# Altium PCB EncoderArm.PcbDoc
Units mil, origin at the board's own origin, x right, y up, seen from the top; angles counter-clockwise.
Board outline 2045.46 x 2608.46 mil, 2 copper layers (Top Layer, Bottom Layer); 6 components, 6 nets, 24 pads, 4 vias.
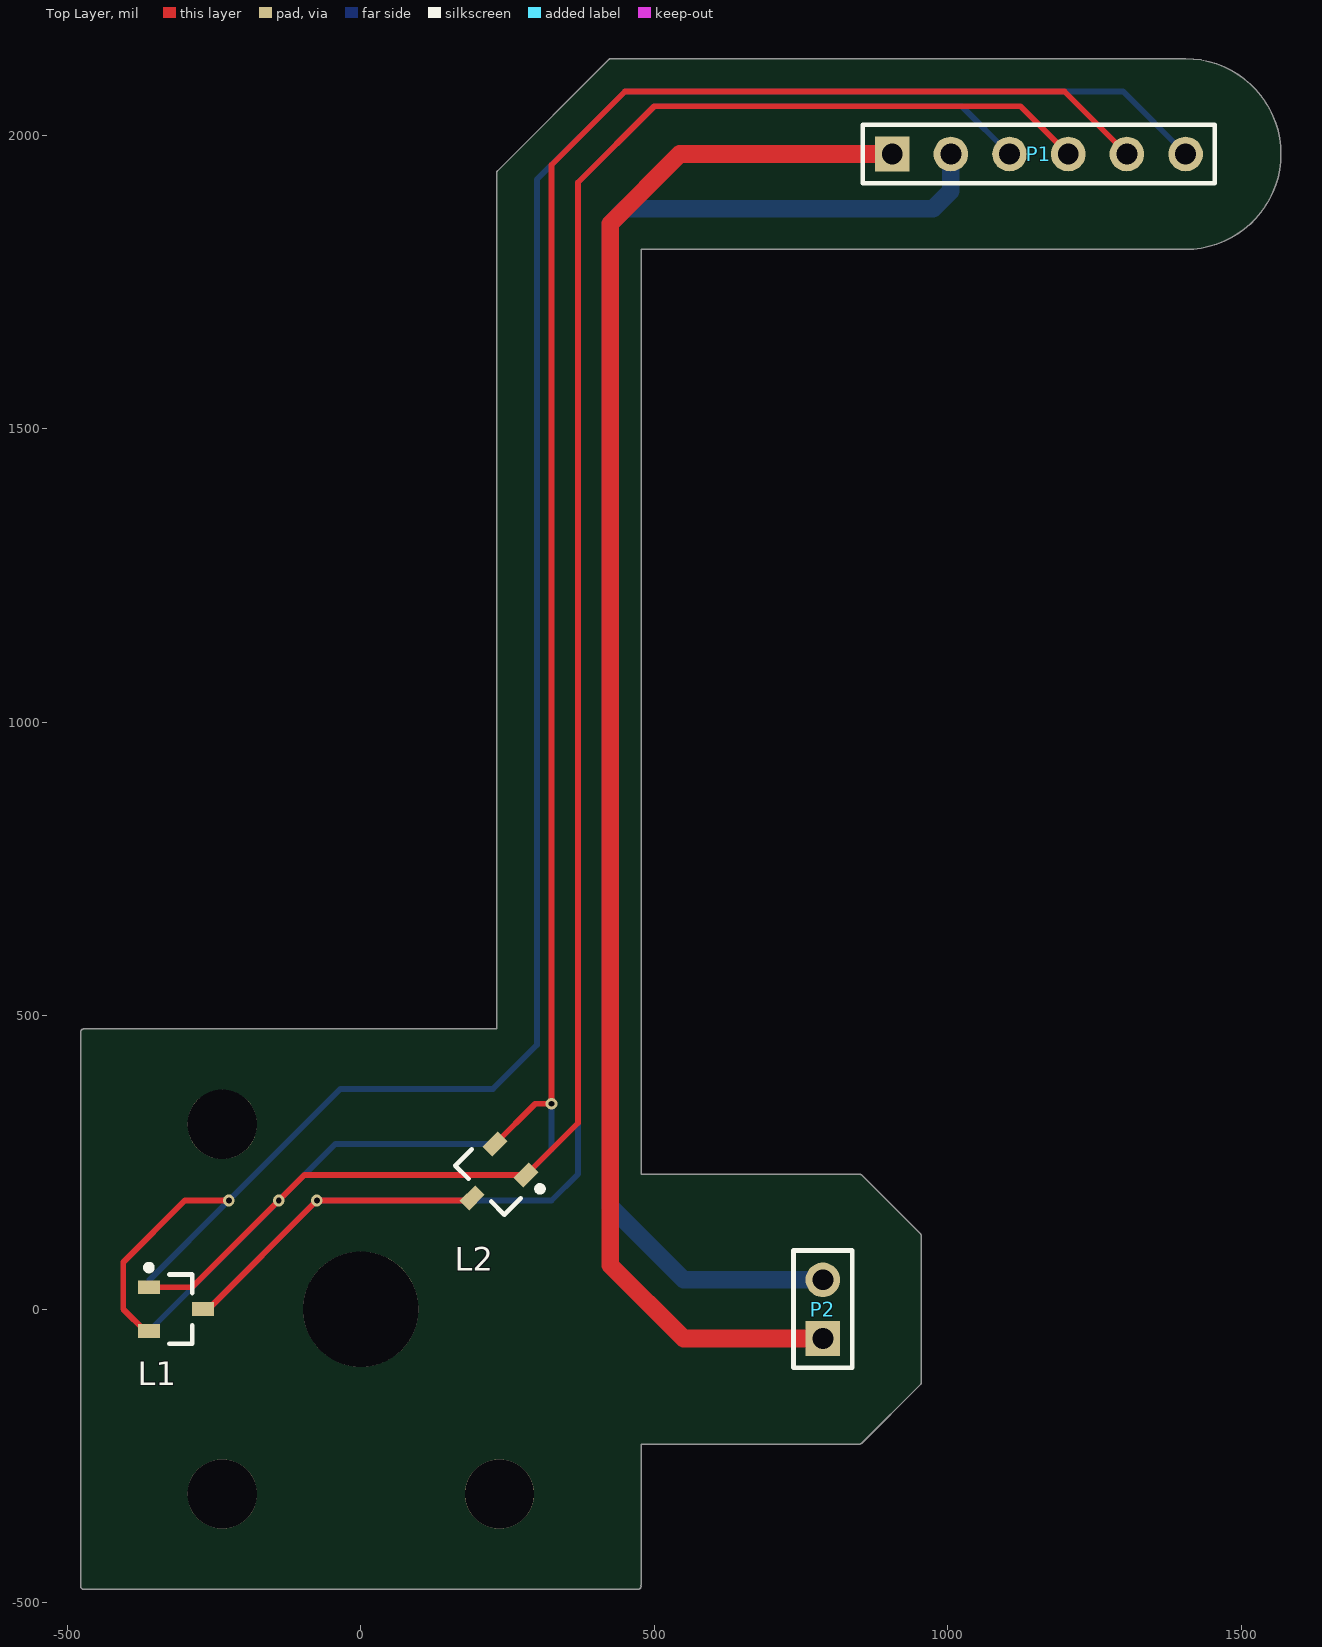
[diagram p0: Top Layer view]
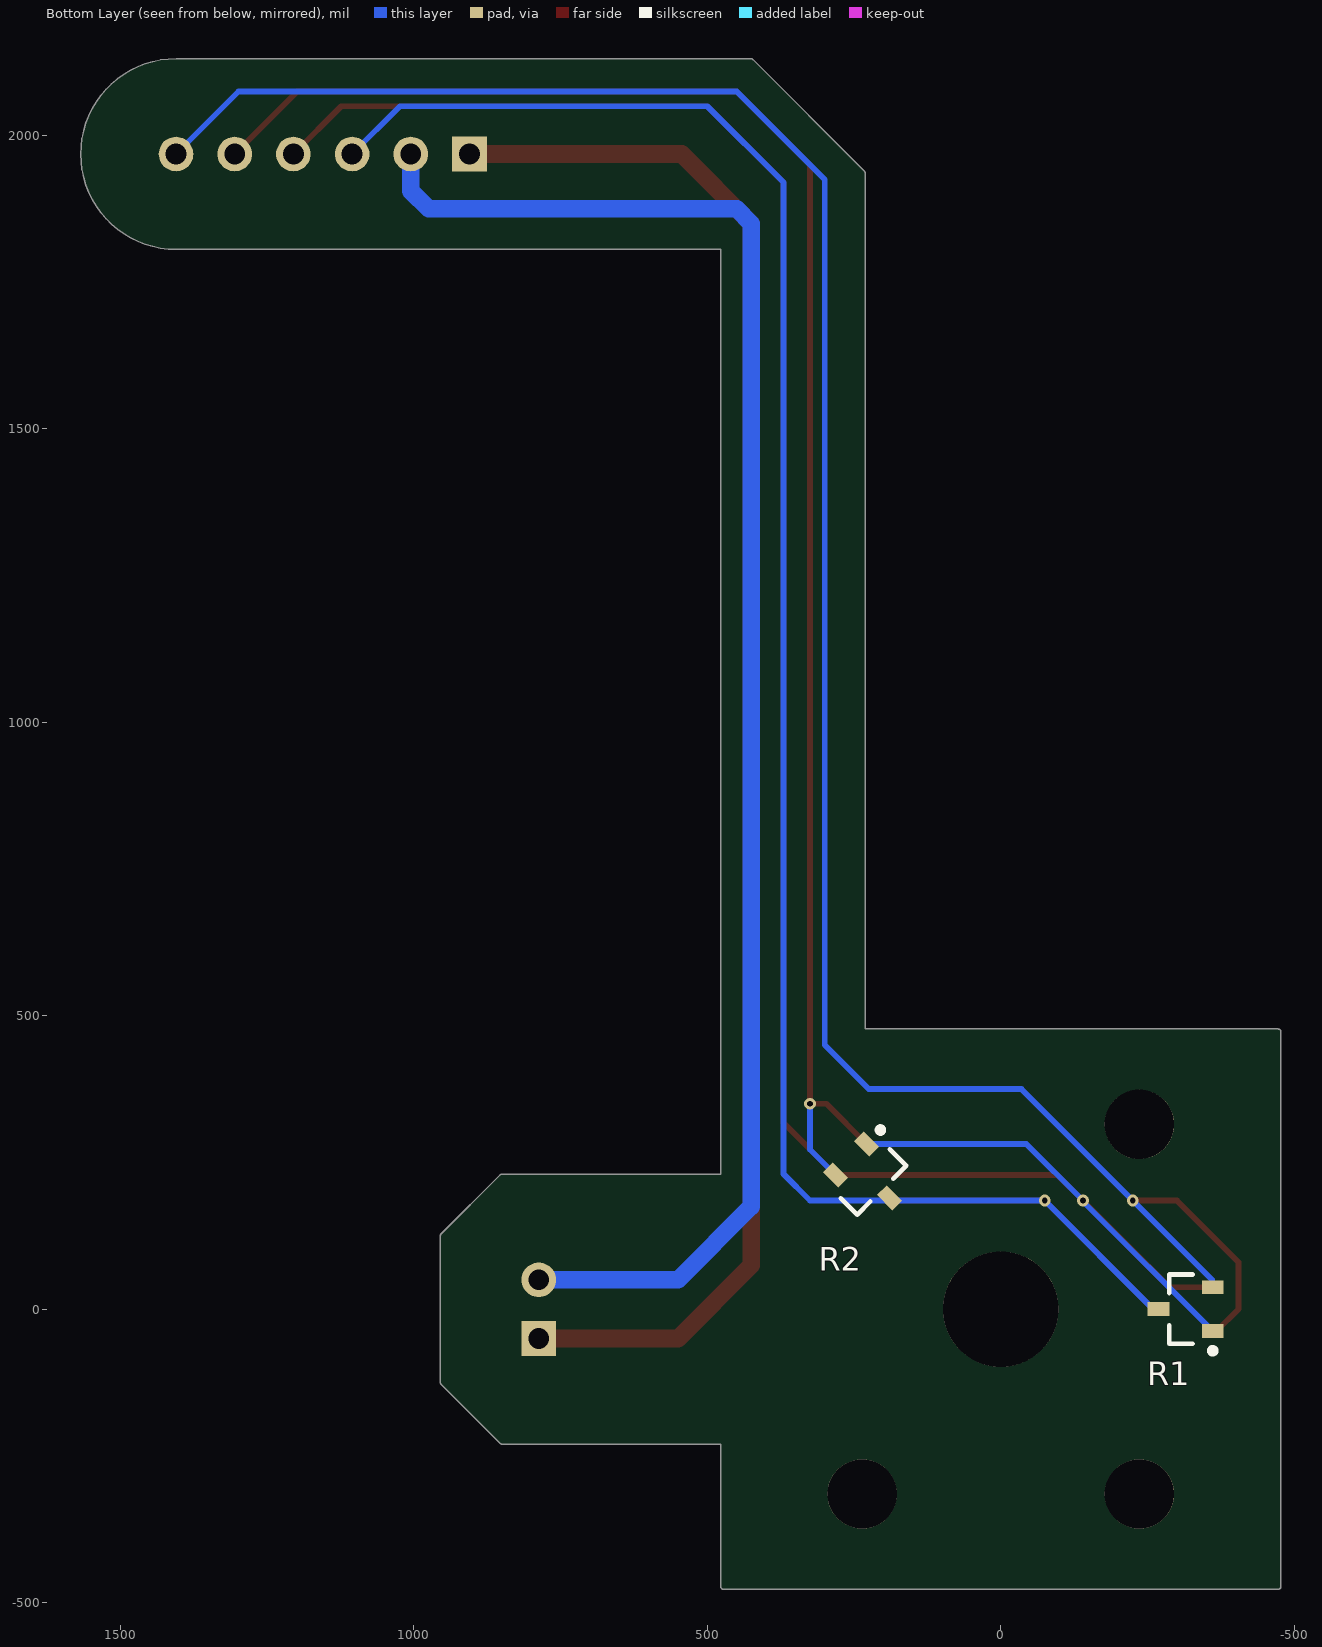
[diagram p1: Bottom Layer view, seen from below]

## Layer stack, top to bottom
Top Solder: solder mask 0.4, Solder Resist, Dk 3.5
Top Layer: signal copper 1.4
Dielectric 1: dielectric 12.6, FR-4, Dk 4.8
Bottom Layer: signal copper 1.4
Bottom Solder: solder mask 0.4, Solder Resist, Dk 3.5

## Board outline
-472.44,-477.46 472.44,-477.46 ccw(c472.44,-472.44) 477.46,-472.44 ccw(c472.44,-472.44) 477.29,-471.16 ccw(c472.44,-469.88) 477.46,-469.88 477.46,-230.02 850,-230.02 ccw(c850,-225) 853.56,-228.53 853.55,-228.55 953.55,-128.55 953.53,-128.56 ccw(c950,-125) 955.02,-125 955.02,125 ccw(c950,125) 953.53,128.56 953.55,128.55 853.55,228.55 853.56,228.53 ccw(c850,225) 850,230.01 477.46,230.01 477.46,1806.01 1405.51,1806.01 ccw(c1405.51,1968.5) 1568.01,1968.5 ccw(c1405.51,1968.5) 1405.51,2131 ccw(c1405.51,2125.99) 1405.42,2131 425.98,2131 ccw(c425.98,2125.98) 422.42,2129.51 422.44,2129.53 232.67,1939.77 232.69,1939.78 ccw(c236.22,1936.22) 231.21,1936.22 231.21,477.46 -472.44,477.46 ccw(c-472.44,472.44) -477.46,472.44 -477.46,-472.44 ccw(c-472.44,-472.44)

## Design rules (kind name [scope] priority, off if disabled: settings)
Clearance [All] p1: gap=10
PolygonConnect [All] p1: connectstyle=Relief reliefconductorwidth=10 reliefentries=4 polygonreliefangle="90 Angle" airgapwidth=10
RoutingVias [All] p1: holewidth=28 width=50 viastyle="Through Hole" minholewidth=28 minwidth=50 maxholewidth=28 maxwidth=50
SolderMaskExpansion [All] p1: expansion=4
Width [All] p1: maxlimit=30 minlimit=10 preferedwidth=10
30 further rules are at their usual default settings.

## Components (designator, comment, footprint, x,y, rotation, side; value= is the part's Value field where it differs from the comment)
L1 "A1120 Hall Effect" SOT23-3N -314.96,0 r0 top
L2 "A1120 Hall Effect" SOT23-3N 222.44,222.44 r225 top
P1 "Connection to Controller" HDR1X6 905.51,1968.5 r0 top
P2 "Motor" HDR1X2 787.4,-50 r90 top
R1 "A1120 Hall Effect" SOT23-3N -314.96,0 r0 bottom
R2 "A1120 Hall Effect" SOT23-3N 222.44,222.44 r225 bottom

## Footprints (in the part's own frame and the unit in brackets; to place one, negate y for a bottom-side part, rotate by r counter-clockwise, add the part's x,y. Pads: shape width x height; smd on the part's side, far side on the other; paste and mask are expansions set on the pad)
HDR1X2 [mm] "Connector; Header; 2 Position"
  rect 1.5x1.5 hole 0.9: 1(0,0)
  round 1.5 hole 0.9: 2(2.54,0)
  silkscreen extent -1.27,-1.27 3.81,1.27
HDR1X6 [mm] "Connector; Header; 6 Position"
  rect 1.5x1.5 hole 0.9: 1(0,0)
  round 1.5 hole 0.9: 2(2.54,0) 3(5.08,0) 4(7.62,0) 5(10.16,0) 6(12.7,0)
  silkscreen extent -1.27,-1.27 13.97,1.27
SOT23-3N [mm] "SOT23, 3-Leads, Body 2.90x2.35mm, Pitch 0.95mm, IPC Medium Density"
  rect 0.95x0.6 smd: 1(-1.175,0.95) 2(-1.175,-0.95) 3(1.175,0)
  silkscreen extent -1.3,-1.5 0.7,1.92, body extent -0.7,-1.5 0.7,1.5, height 1.1

## Part data
L1 L2 R1 R2: library part FT_SOT23-3
P1: library part "Header 6", "Header, 6-Pin"
P2: library part "Header 2", "Header, 2-Pin"

## Free pads (board coordinates)
  round 118.11 hole 118.11: 0(-236.22,-314.96) 0(-236.22,314.96) 0(236.22,-314.96)
  round 196.85 hole 196.85: 0(0,0)

## Via types
v1: diameter 20, hole 10, Top Layer to Bottom Layer, 4 vias

## Nets (pads, with @x,y where several pads share a name; then routed paths per layer and width w, separated by ;. In a path a pad name is that pad's centre, name@x,y a point inside that pad or via, vN(x,y) a via of type N, cw(c..) or ccw(c..) an arc to the next point about the centre after c; other vN are vias at no path point)
GND: L1.3 L2.3 P1.3 R1.3 R2.3 | length 3784.1
  Top Layer w10: L1.3 -260,0 v1(-75,185) 185,185 L2.3
  Bottom Layer w10: R1.3 -260,0 v1(-75,185) 325,185 370,230 370,1920 500,2050 1024.02,2050 P1.3
M1A: P1.1 P2.1 | length 2718.8
  Top Layer w30: P2.1 550,-50 425,75 425,1850 543.5,1968.5 P1.1
M1B: P1.2 P2.2 | length 2755.7
  Bottom Layer w30: P2.2 550,50 425,175 425,1850 450,1875 975,1875 1005.51,1905.51 P1.2
VCC: L1.1 L2.1 P1.4 R1.1 R2.1 | length 4095.5
  Top Layer w10: L1.1 -287.6,37.4 v1(-140,185) -96.3,228.7 L2.1 370,317.11 370,1920 500,2050 1124.02,2050 P1.4
  Bottom Layer w10: R1.1 v1@-139.41,184.41 ; v1(-140,185) -43.4,281.6 R2.1
VOUT1: L1.2 P1.6 R1.2 | length 3888.3
  Top Layer w10: L1.2 -367.6,-37.4 -405,0 -405,80 -300,185 v1(-225,185)
  Bottom Layer w10: R1.2 -360,38.62 -360,50 v1(-225,185) -35,375 225,375 300,450 300,1925 450,2075 1299.02,2075 P1.6
VOUT2: L2.2 P1.5 R2.2 | length 2940.3
  Top Layer w10: L2.2 297.11,350 v1(325,350) 325,1950 450,2075 1199.02,2075 P1.5
  Bottom Layer w10: R2.2 325,272.11 v1(325,350)

## Silkscreen, mask and mechanical layers (free items; w line width, h text height)
Mechanical 1:
  lines w10: 472.44,-472.44 -472.44,-472.44 -472.44,472.44 236.22,472.44 236.22,1815 236.22,1936.22 425.98,2125.98 1045,2125.98 1405.51,2125.98 ; 472.44,-469.88 472.44,-225 850,-225 950,-125 950,125 850,225 472.44,225 472.44,1811.02 1405.51,1811.02 ccw(c1405.51,1968.5) 1405.51,2125.99